# Altium PCB RiskChemi_Monitor_V1.03.PcbDoc
Units mil, origin at the board's own origin, x right, y up, seen from the top; angles counter-clockwise.
Board outline 4785.03 x 2920.97 mil, 2 copper layers (Top Layer, Bottom Layer); 53 components, 47 nets, 225 pads, 566 vias.
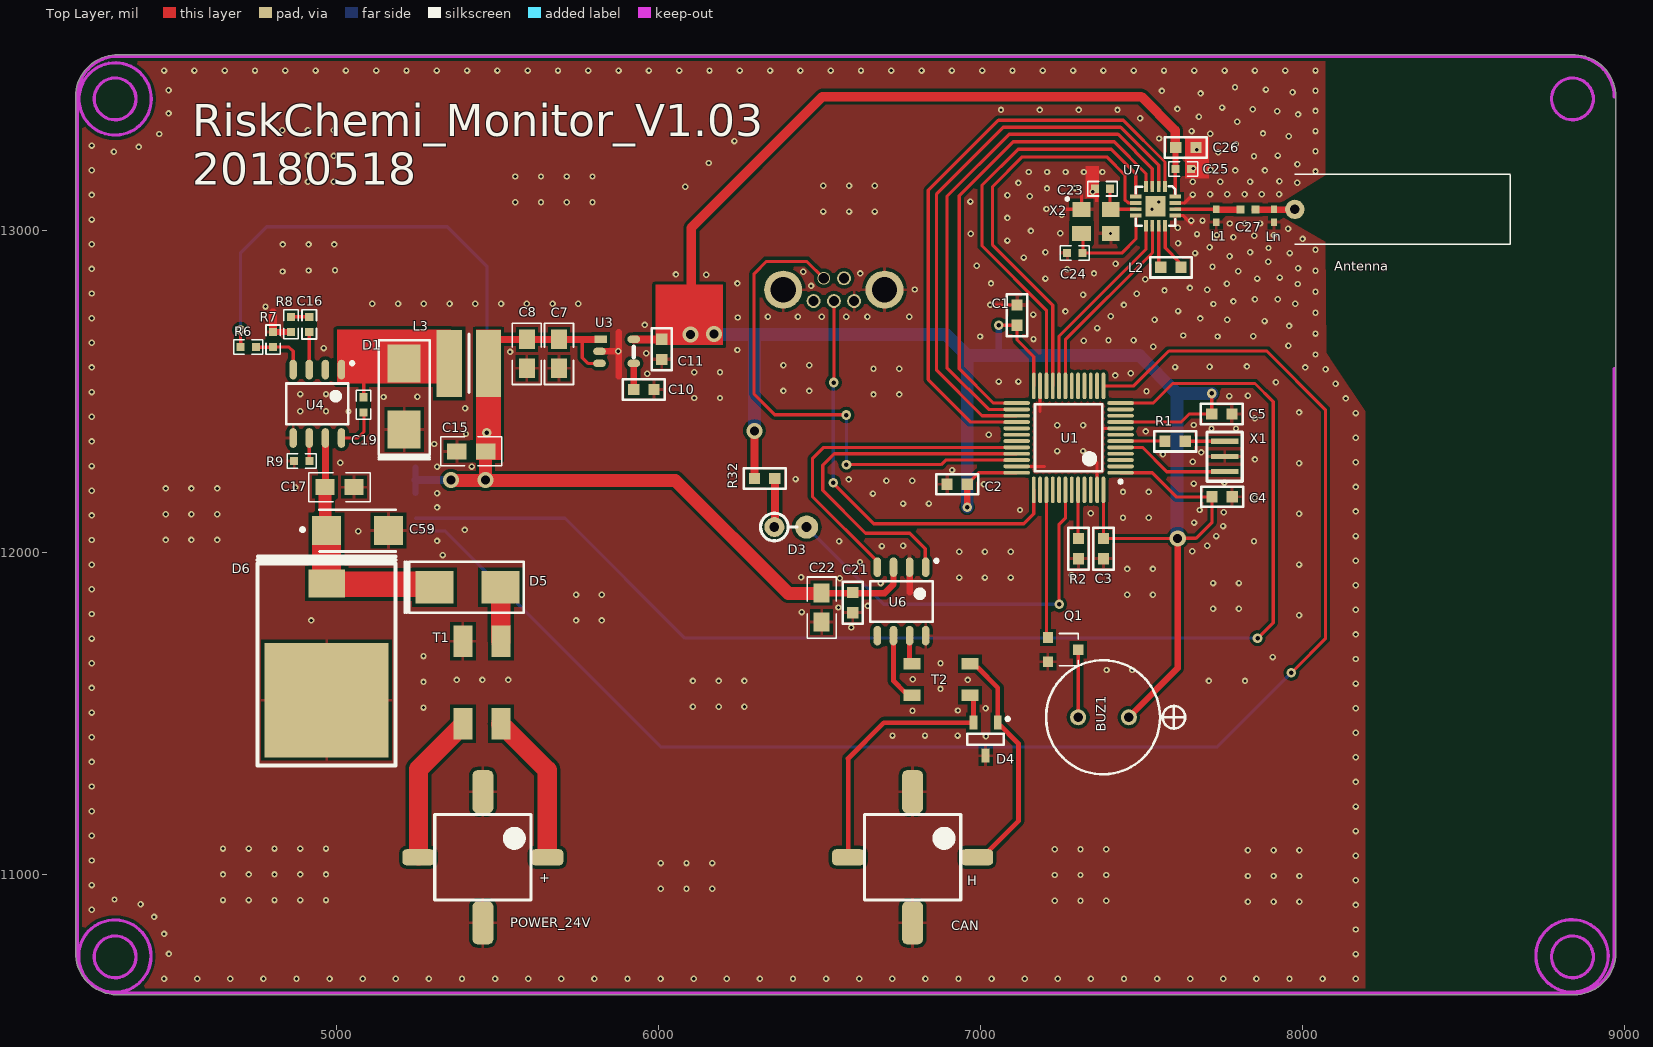
[diagram p0: Top Layer view]
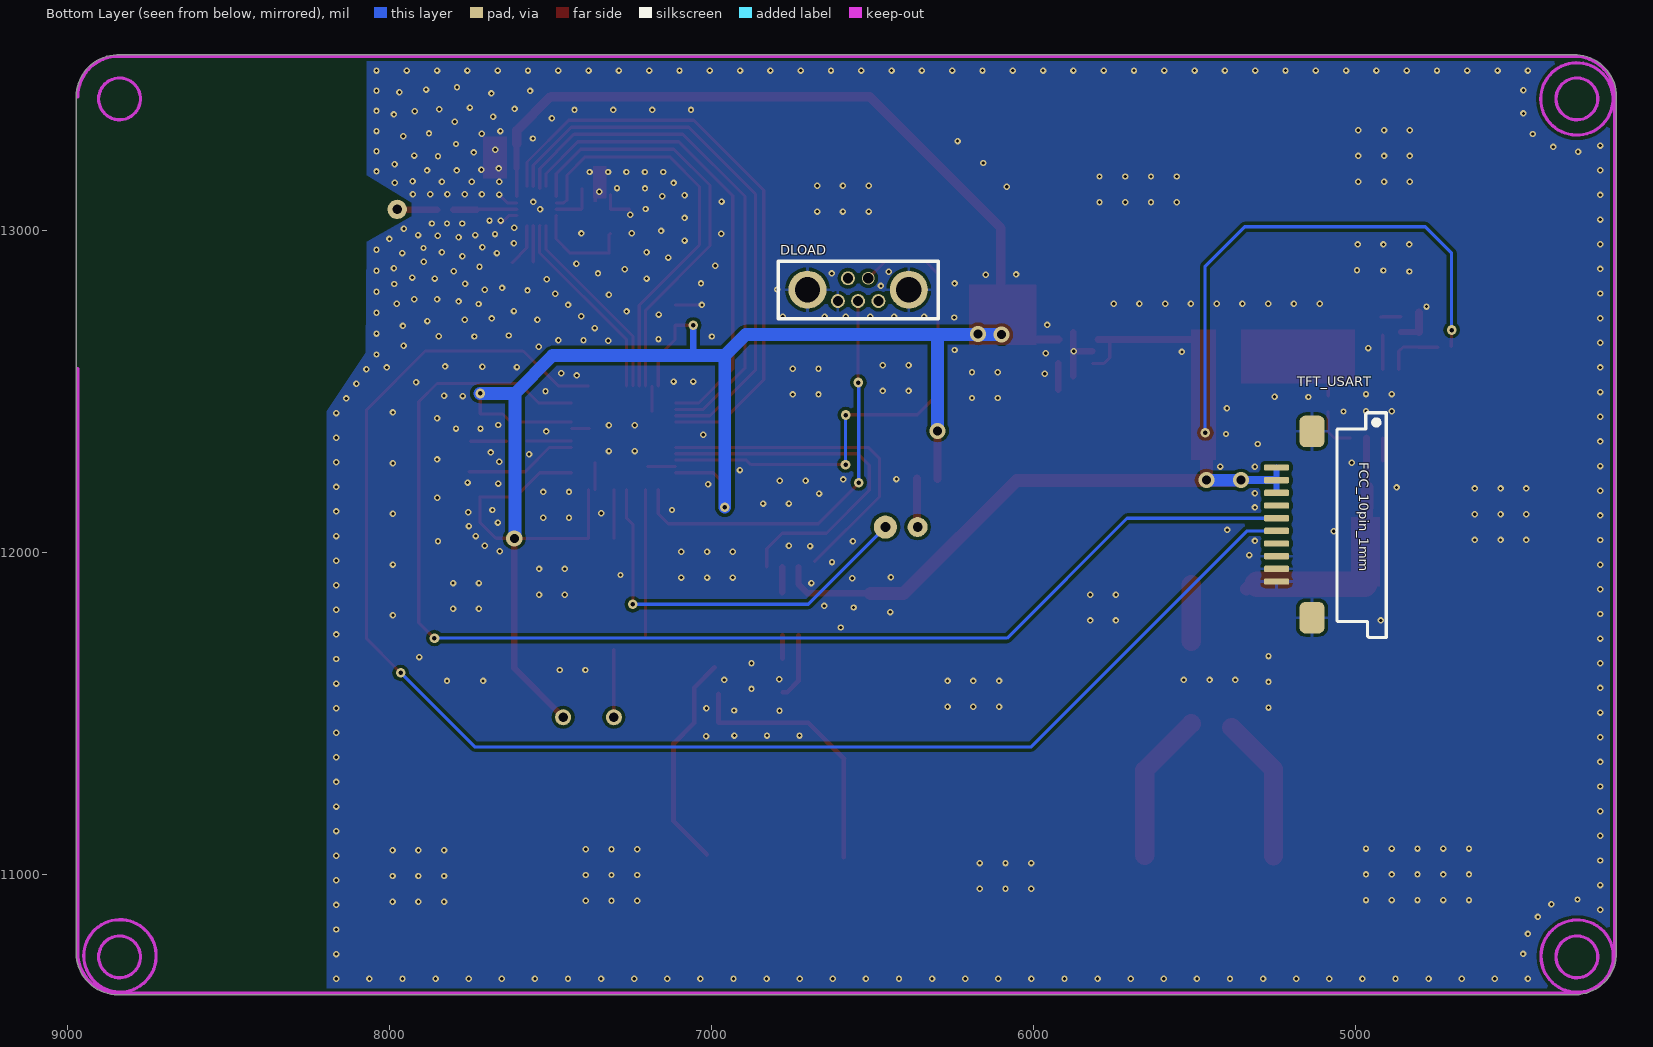
[diagram p1: Bottom Layer view, seen from below]

## Layer stack, top to bottom
Top Solder: solder mask 0.4, Solder Resist, Dk 3.5
Top Layer: signal copper 1.4
Dielectric 1: dielectric 12.6, FR-4, Dk 4.8
Bottom Layer: signal copper 1.4
Bottom Solder: solder mask 0.4, Solder Resist, Dk 3.5

## Board outline
4314.82,10626.02 ccw(c4315.45,10631) 4315.45,10625.99 8843,10625.99 ccw(c8843,10756) 8973.01,10755.2 ccw(c8843,10756) 8973.01,10756 8973.01,13416 ccw(c8843,13416) 8845.98,13545.98 ccw(c8843,13541.94) 8843,13546.96 4314.15,13546.96 ccw(c4314.15,13541.94) 4310.97,13545.82 ccw(c4318,13416) 4187.99,13416 4187.99,10748.45 ccw(c4193,10748.45) 4188.32,10746.64 ccw(c4318,10756)

## Design rules (kind name [scope] priority, off if disabled: settings)
Clearance Clearance_1 [InNamedPolygon('Top Layer-No Net1')] p1: gap=10
Clearance [All] p2: gap=3
ComponentClearance [All] p1: gap=0 collisioncheckmode=3 verticalgap=0 showdistances=FALSE
PolygonConnect PolygonConnect_Via [IsVia] p1: connectstyle=Direct reliefconductorwidth=10 reliefentries=4 polygonreliefangle="90 Angle" airgapwidth=10
PolygonConnect PolygonConnect_DGND [InNet('DGND')] p2: connectstyle=Relief reliefconductorwidth=10 reliefentries=4 polygonreliefangle="90 Angle" airgapwidth=10
RoutingVias [All] p1: holewidth=28 width=50 viastyle="Through Hole" minholewidth=28 minwidth=50 maxholewidth=28 maxwidth=50
SilkToSilkClearance [All] p1 off: silktosilkclearance=10
SilkToSolderMaskClearance [IsPad] p1 off: minsilkscreentomaskgap=10 clearancetoexposedcopper=TRUE
SolderMaskExpansion [All] p1: expansion=4
Width [All] p1: maxlimit=100 minlimit=10 preferedwidth=10
27 further rules are at their usual default settings.

## Components (designator, comment, footprint, x,y, rotation, side; value= is the part's Value field where it differs from the comment)
Antenna "AT" "433MHz Atenna" 7976,13066 r90 top (schematic designator Atenna)
BUZ1 "BUZZER" BUZ0905 7382,11488 r0 top
C1 "100nF" 0603 7117,12676 r180 top
C2 "100nF" 0603 6988,12216 r270 top
C3 "100nF" 0603 7377,12073 r0 top
C4 "100nF" 0603 7689,12169 r90 top
C5 "1uF" 0603 7688,12426 r90 top
C7 "100nF" 0805 5665,12575 r270 top
C8 "22uF" 0805 5565,12575 r270 top
C10 "22nF" 0603 5892,12502 r90 top
C11 "1uF" 0603 6005,12692 r0 top
C15 "22uF" 0805 5375,12339 r180 top
C16 "330pF" 0402#1 4910,12812.66 r0 top
C17 "1uF" 0805 5050,12178 r0 top
C19 "100nF" 0402#1 5079,12563 r0 top
C21 "100nF" 0603 6607,11783 r180 top
C22 "22uF" 0805 6481,11787 r270 top
C23 "18pF" 0402#1 7274,13126 r90 top
C24 "18pF" 0402#1 7188,12926 r90 top
C25 "470pF" 0402#1 7525,13187 r90 top
C26 "100nF" 0603 7576,13254 r90 top
C27 "2.7pF" nosilk_0402 7803,13062 r90 top
C59 "10uF" 6032_pol 5180,12023 r0 top
CAN "Header 4" C3000VS 6938,11186 r90 top
D1 "B290-13-F" B290 5209,12382 r90 top
D3 "LED0" LED 6359,12079 r270 top
D4 "PESD2CAN" SOT23 7013,11419 r270 top
D5 "VS-3EJH02HM3/6A" B290 5303,11892 r0 top
D6 "SM8S33" SM8S 4968,11541 r90 top
DLOAD "USB Connector" Mini_USB 6543.84,12781 r90 bottom
L1 "6.8nH" 0402#2 7732,13046 r90 top
L2 "3.9nH" 0603 7652,12890 r270 top
L3 "15uH" "4*4 Inductor" 5410,12595 r90 top
Ln "6.8nH" 0402#2 7911,13046 r90 top
POWER_24V "Header 4" C3000VS 5603,11186 r90 top
Q1 "2N7002" 2N7002 7255,11700 r270 top
R1 "100" 0603 7543,12341 r90 top
R2 "10K" 0603 7308,11951 r180 top
R6 "210K" 0402#1 4620,12634 r90 top
R7 "40.2K" 0402#1 4806,12557 r180 top
R8 "47.5K" 0402#1 4853,12813 r0 top
R9 "200K" 0402#1 4995,12288 r270 top
R32 "2.2K" 0603 6390,12234 r270 top
T1 "ACM7060-301-2PL-TL01" ACM7060-301-2P-TL01 5508,11466 r90 top
T2 "ACT45B-510-2P" ACT45B-510-2P 6787,11556 r0 top
TFT_USART "TFT" FCC_10pin_1mm 5244,12264 r0 bottom
U1 "STM32F103C8T6" STM-LQFP48_M 7273,12356 r180 top
U3 "RT9193" SOT-23-5 5863,12623 r270 top
U4 "MP2565" SO8 4940,12463 r270 top
U6 "TJA1050T" SO8 6755,11849 r270 top
U7 "CMT2219A" QFN16 7543.58,13076.16 r270 top
X1 "8M smd" 8Mhz_XTAL 7758,12251 r90 top
X2 "XTAL_TSX3225_26M" XTAL3225 7403.58,12991.16 r180 top

## Footprints (in the part's own frame and the unit in brackets; to place one, negate y for a bottom-side part, rotate by r counter-clockwise, add the part's x,y. Pads: shape width x height; smd on the part's side, far side on the other; paste and mask are expansions set on the pad)
2N7002 [mm]
  rect 0.85x0.8 smd: 1(0.047,1.221) 2(-0.903,-1.179) 3(0.997,-1.179)
  silkscreen extent -1.23,-0.28 1.32,1.22
"4*4 Inductor" [mm]
  rect 5.3x2 smd: 1(-0.203,-1.548) 2(-0.203,1.552)
  silkscreen extent -2.46,0 2.13,0
8Mhz_XTAL [mm]
  rect 0.4x2.2 smd: 1(0,0) 2(1.2,0) 3(2.4,0)
  silkscreen extent -0.75,-1.39 3.13,1.4
0402#1 [mil]
  rect 25x25 smd: 1(4.06,-127.99) 2(4.06,-80.75)
  silkscreen extent -19,-150 26,-59
0402#2 [mil] "Chip Capacitor, Body 1.0x0.5mm, IPC High Density"
  rect 23.62x19.68 smd: 1(-19.69,0) 2(19.69,0)
  body extent -22,-12 22,12, height 51
"433MHz Atenna" [mil]
  round 60 hole 30: 1(-0.04,0.19)
  silkscreen extent -108,-670 108,0
0603 [mil]
  rect 35x35 smd: 1(4.25,-92.76) 2(4.25,-29.76)
  silkscreen extent -27,-126 36,4
0805 [mil]
  rect 60x50 smd: 1(3,25) 2(-87,25)
  silkscreen extent -137,-20 53,70
6032_pol [mm]
  rect 2.3x2.3 smd: 1(-5.396,1.143) 2(-0.496,1.143)
  silkscreen extent -7.43,-0.51 0.05,2.79
ACM7060-301-2P-TL01 [mm]
  rect 2.5x1.5 smd: 1(0.051,-0.028) 2(6.551,-0.028) 3(0.051,2.972) 4(6.551,2.972)
ACT45B-510-2P [mm]
  rect 1.35x0.9 smd: 1(0,0) 2(4.55,0) 3(0,2.5) 4(4.55,2.5)
B290 [mm]
  rect 3x2.6 smd: 1(0,0) 2(5.2,0)
  silkscreen extent -2.34,-2 7.06,2
BUZ0905 [mm] "Buzzer"
  round 1.27 hole 0.75: 1(1.985,0.002) 2(-2.015,0.002)
  silkscreen extent -4.54,-4.5 6.43,4.5
C3000VS [mm]
  rrect50% 1.27x2.54 smd: 1(-3.375,-1.28) 2(-3.375,8.88)
  rrect50% 3.4x1.65 smd: 3(-8.55,3.8) 4(1.8,3.8)
  silkscreen extent -6.75,0 0,7.6
FCC_10pin_1mm [mm]
  rrect50% 2x0.5 smd: 1(0,0) 2(0,1) 3(0,2) 4(0,3) 5(0,4) 6(0,5) 7(0,6) 8(0,7) 9(0,8) 10(0,9)
  rrect50% 2x2.5 smd: 11(-2.8,-2.85) 12(-2.8,11.85)
  silkscreen extent -8.66,-4.32 -4.78,13.41
LED [mil]
  round 62 hole 30: 1(0,0)
  round 72 hole 30: 2(0,100)
  silkscreen extent -43,-43 43,70
Mini_USB [mm] "180 degree"
  round 1.1 hole 0.8: 1(0,-1.6) 3(0,0) 4(1.8,0.8) 5(0,1.6)
  round 1 hole 0.8: 2(1.8,-0.8)
  round 3 hole 2: 6(0.9,4) 7(0.9,-4)
  silkscreen extent -1.39,-6.32 3.15,6.3
nosilk_0402 [mil]
  rect 25x25 smd: 1(4.06,-50.99) 2(4.06,-3.75)
QFN16 [mm]
  rect 1x0.4 on Top Solder: 0(-1.546,0.735) 0(-1.546,-0.265) 0(-1.546,0.235) 0(-1.546,-0.765) 0(1.554,0.735) 0(1.554,-0.265) 0(1.554,0.235) 0(1.554,-0.765)
  rect 0.4x1 on Top Solder: 0(-0.746,1.535) 0(-0.746,-1.565) 0(-0.246,1.535) 0(-0.246,-1.565) 0(0.254,1.535) 0(0.254,-1.565) 0(0.754,1.535) 0(0.754,-1.565)
  rect 1.6x1.6 smd: 0(0.004,-0.015)
  rect 0.9x0.3 smd paste-0.175 mask-0.175: 1(-1.546,0.735) 2(-1.546,0.235) 3(-1.546,-0.265) 4(-1.546,-0.765) 9(1.554,-0.765) 10(1.554,-0.265)
  rect 0.3x0.9 smd paste-0.175 mask-0.175: 5(-0.746,-1.565) 6(-0.246,-1.565) 7(0.254,-1.565) 8(0.754,-1.565) 13(0.754,1.535) 14(0.254,1.535) 15(-0.246,1.535) 16(-0.746,1.535)
  rect 0.9x0.3 smd paste-0.225 mask-0.225: 11(1.554,0.235) 12(1.554,0.735)
  silkscreen extent -1.55,-1.58 1.56,1.56
SM8S [mm]
  rect 9x9.8 smd: 1(0,0)
  rect 2.2x2.9 smd: 2(9.2,0)
  silkscreen extent -5.14,-5.44 11.35,5.44
SO8 [mm] "39MM"
  oval 1.55x0.6 smd: 1(-2.675,1.88) 2(-2.675,0.61) 3(-2.675,-0.66) 4(-2.675,-1.93) 5(2.725,-1.93) 6(2.725,-0.66) 7(2.725,0.61) 8(2.725,1.88)
  silkscreen extent -3.3,-2.48 1.63,2.85
SOT23 [mm]
  rect 1.1x0.6 smd: 1(-1.325,1.001) 2(-1.325,-0.899) 3(1.275,0.051)
  silkscreen extent -1.75,-1.4 0.4,1.93
SOT-23-5 [mm]
  rect 0.6x1 smd: 1(-0.995,-1.101)
  oval 0.6x1 smd: 2(-0.045,-1.201) 3(0.905,-1.201) 4(0.905,1.499) 5(-0.995,1.499)
  silkscreen extent -0.4,1.5 0.4,1.5, body extent -1.5,-1.3 1.4,1.5, height 1.2
STM-LQFP48_M [mm] "QFP, 48-Leads, Body 7x7mm, Pitch 0.5mm, IPC Low Density"
  oval 2.1x0.3 smd: 1(-4.1,2.75) 2(-4.1,2.25) 3(-4.1,1.75) 4(-4.1,1.25) 5(-4.1,0.75) 6(-4.1,0.25) 7(-4.1,-0.25) 8(-4.1,-0.75) 9(-4.1,-1.25) 10(-4.1,-1.75) 11(-4.1,-2.25) 12(-4.1,-2.75) 25(4.1,-2.75) 26(4.1,-2.25) 27(4.1,-1.75) 28(4.1,-1.25) 29(4.1,-0.75) 30(4.1,-0.25) 31(4.1,0.25) 32(4.1,0.75) 33(4.1,1.25) 34(4.1,1.75) 35(4.1,2.25) 36(4.1,2.75)
  oval 0.3x2.1 smd: 13(-2.75,-4.1) 14(-2.25,-4.1) 15(-1.75,-4.1) 16(-1.25,-4.1) 17(-0.75,-4.1) 18(-0.25,-4.1) 19(0.25,-4.1) 20(0.75,-4.1) 21(1.25,-4.1) 22(1.75,-4.1) 23(2.25,-4.1) 24(2.75,-4.1) 37(2.75,4.1) 38(2.25,4.1) 39(1.75,4.1) 40(1.25,4.1) 41(0.75,4.1) 42(0.25,4.1) 43(-0.25,4.1) 44(-0.75,4.1) 45(-1.25,4.1) 46(-1.75,4.1) 47(-2.25,4.1) 48(-2.75,4.1)
  silkscreen extent -4.23,-2.65 2.65,3.57, body extent -3.5,-3.5 3.5,3.5, height 1.6
XTAL3225 [mm]
  rect 1.4x1.2 smd: 1(0,-1.9) 2(2.3,-1.9) 4(0,0)
  rect 1.5x1.2 smd: 3(2.3,0)
  silkscreen extent 3.32,-2.82 3.52,-2.62

## Part data
BUZ1: "Buzzer"
C1 C2 C3 C4 C5 C8 C10 C11 C16 C19 C21 C22 C23 C24 C25 C26 C27: library part Cap, "Capacitor"
C7 C17: library part Cap, "Capacitor,100V"
C15: library part Cap, "Capacitor,50V"
C59: library part "Cap Pol1", "Polarized Capacitor (Radial)"
CAN POWER_24V: "Header, 4-Pin"
D1: library part Diode, "Default Diode"
D3: "green LED"
D4: library part PESD1CAN
D5 D6: library part "Diode 1N4007", "1 Amp General Purpose Rectifier"
DLOAD: library part Component_1
L1 L2 Ln: library part Inductor, "Inductor"
L3: library part Inductor, "Inductor, 1A"
Q1: library part N-MOSFET
R1 R2 R6 R7 R8 R9 R32: library part Res1, "Resistor"
T1 T2: library part "Trans Eq", "Transformer (Equivalent Circuit Model)"
TFT_USART: library part "Header 12", "Header, 12-Pin"
U1: "ARM Cortex-M3 32-bit MCU, 64 KB Flash, 20 KB Internal RAM, 37 I/Os, 48-pin LQFP, -40 to 85 degC, Tray"
U4: library part MP1584, "DCDC 4.5V~28V input 1.8V ~5V output low power"
U6: "CAN Tranceiver"
X2: library part XTAL_Negative

## Via types
v1: diameter 20, hole 10, Top Layer to Bottom Layer, tented both sides, 542 vias
v2: diameter 30, hole 14, Top Layer to Bottom Layer, 7 vias
v3: diameter 20, hole 10, Top Layer to Bottom Layer, 6 vias
v4: diameter 50, hole 28, Top Layer to Bottom Layer, 6 vias
v5: diameter 30/30 (per signal layer), hole 14, Top Layer to Bottom Layer, 5 vias

## Nets (pads, with @x,y where several pads share a name; then routed paths per layer and width w, separated by ;. In a path a pad name is that pad's centre, name@x,y a point inside that pad or via, vN(x,y) a via of type N, cw(c..) or ccw(c..) an arc to the next point about the centre after c; other vN are vias at no path point)
5V: C7.2 C8.2 C15.2 C21.1 C22.2 L3.1 R6.2 TFT_USART.1 TFT_USART.2 TFT_USART.3 U3.1 U3.3 U6.3 | length 4157
  Top Layer w10: v5@4700.75,12684.25 R6.2@4701,12640 ; C15.2@5465,12310 v5(5465,12372) ; 5762,12659 5762,12605 5779.63,12587.37 U3.3
  Top Layer w20: C22.2 6702,11874 6729,11901 ; 6729,11903 U6.3
  Top Layer w22: L3.1@5495.17,12662.17 5798.65,12662.17
  Top Layer w30: C22.2@6506,11873 C22.2
  Top Layer w40: v4@5354,12224 v4@5463,12224 ; C15.2 v4(5462,12225) v4@5463,12224 ; C22.2@6506,11873 6402,11873 6051,12224 v4@5463,12224
  Bottom Layer w10: v5(4700,12691) 4700,12930 4782,13012 5343,13012 5466,12889 v5@5466,12371
  Bottom Layer w20: TFT_USART.3@5244,12186 TFT_USART.2 TFT_USART.1@5244,12263
  Bottom Layer w25: TFT_USART.2 5415,12224.63
  Bottom Layer w40: v4@5360,12224 v4(5462,12225)
  other v4: 5354,12225
24V: C17.2 C59.1 D5.1 D6.2 U4.7 | length 663.8
  Top Layer w22: C17.2@4964,12204 U4.7
  Top Layer w40: C17.2@4963,12202 C59.1@4963.6,12067.98 ; D5.1@5306,11918 D5.1@5338,11886
  Top Layer w80: D6.2@4970.2,11901 D5.1@5303,11901
BUZZER: Q1.2 U1.39 | length 453.6
  Top Layer w10: Q1.2@7204.1,11741 U1.39
CAN_RX: U1.32 U6.4 | length 1051.2
  Top Layer w10: U6.4@6678.5,11972.5 6477,12174 6477,12291 6512.47,12326.47 U1.32
CAN_TX: U1.33 U6.1 | length 1145.4
  Top Layer w10: U6.1@6828,11956 6828,12012 6780,12060 6642,12060 6509,12193 6509,12271 6544.79,12306.79 U1.33
CLKO: U1.21 U7.6 | length 1284.2
  Top Layer w10: U1.21 7223.79,12768.21 7037,12955 7037,13137 7129,13229 7391.64,13229 7448,13172.64 7448,13096 7458.16,13085.84 U7.6
CSB: U1.28 U7.1 | length 1872.9
  Top Layer w10: U1.28 6968.79,12405.21 6837,12537 6837,13125 7055,13343 7442.64,13343 7572.53,13213.11 U7.1
D3V3: BUZ1.1 C1.2 C2.2 C3.2 C4.2 C5.2 C11.2 C25.2 C26.2 R32.1 U1.1 U1.9 U1.24 U1.36 U1.48 U3.5 U7.16 | length 7978.1
  Top Layer w10: C2.2 6994.22,12247.73 U1.36 ; v5@7052.24,12705.76 C1.2 ; C1.2@7113,12707 7113,12660 7164.73,12608.27 U1.24 ; U1.48 C3.2 v4@7604.24,12043.24 ; U1.1 7533.27,12247.73 7609,12172 C4.2@7718.76,12172 ; U1.9 7622.21,12405.21 7647.25,12430.25 C5.2 v5@7717.76,12495 ; U7.16 7604.02,13194.19 C25.2@7605.14,13195.3 ; C26.2@7604.16,13270.5 C26.2@7605.14,13269.52 ; v4(7612,12044) 7669,12044 7718.76,12093.76 C4.2@7718.76,12172 ; C4.2 C4.2@7718.76,12172
  Top Layer w20: v2(6958,12141) 6958,12211.51 C2.2 ; BUZ1.1@7461,11490 7612,11641 v4(7612,12044) ; C25.2@7605.14,13195.3 C26.2@7605.14,13269.52
  Top Layer w25: U3.5 v4@6096.83,12662.17 ; R32.1@6297,12228 v4(6297,12378)
  Top Layer w30: v4@6101,12661 6101,13009 6508,13416 7499,13416 7604.16,13310.85 C26.2@7604.16,13270.5
  Bottom Layer w20: 7056,12613 v5(7056,12706)
  Bottom Layer w40: v4(6098,12677) 6893,12677 6958,12612 ; v4(6297,12378) 6297,12665 6304,12672 6301,12675 ; v2(6958,12141) 6958,12612 ; v4@7610,12055 7610,12494 ; v5@7719,12494 7610,12494 ; 6958,12612 7493,12612 7610,12494
  other v4: 6171,12679
  other v5: 7718,12494
DGND: C1.1 C2.1 C3.1 C4.1 C5.1 C7.1 C8.1 C10.1 C11.1 C15.1 C17.1 C21.2 C22.1 C23.2 C24.2 C25.1 C26.1 C59.2 CAN.3 CAN.4 D1.1 D4.3 D6.1 DLOAD.5 DLOAD.6 DLOAD.7 L1.1 Ln.1 POWER_24V.3 POWER_24V.4 Q1.3 R2.2 R7.1 R8.1 R9.1 T1.4 TFT_USART.8 TFT_USART.9 TFT_USART.10 TFT_USART.11 TFT_USART.12 U1.8 U1.23 U1.35 U1.47 U3.2 U4.5 U6.2 U6.8 U7.0@7543,13076 U7.13 U7.15 X1.2 X2.2 X2.4 | length 1006.5
  Top Layer w10: v1@7027.24,12768.76 C1.1 ; U1.35 7198.42,12267.42 ; 7184.42,12438.58 U1.23 ; 7254.04,13065.96 X2.2 7313.03,13112.03 ; U1.47 7361.58,12278.58 ; 7378.53,12385.53 U1.8 ; U7.13 7629.17,13046.47 v1@7654.39,13021.25 ; U7.15 7633.99,13085.84 v1@7654.39,13106.25
  Top Layer w20: R7.1 R8.1@4856.99,12684.99 ; U3.2 v1@5876,12624.77 ; 5876,12547 v1@5876,12624.77 ; 5876,12684 v1@5876,12624.77 ; 6779,11876 U6.2
  Top Layer w25: R7.1 4801.94,12745.06
  other v1: 4463,10676 4565.83,10676 4668.67,10676 4771.5,10676 4874.33,10676 4977.17,10676 5080,10676 5182.83,10676 5285.67,10676 5388.5,10676 5491.33,10676 5594.17,10676 5697,10676 5799.83,10676 5902.66,10676 6005.5,10676 6108.33,10676 6211.16,10676 6314,10676 6416.83,10676 6519.66,10676 6622.5,10676 6725.33,10676 6828.16,10676 6931,10676 7033.83,10676 7136.66,10676 7239.5,10676 7342.33,10676 7445.16,10676 7548,10676 7650.83,10676 7753.66,10676 7856.5,10676 7959.33,10676 8062.16,10676 8165,10676 8165,10752.39 4478,10753 4463,10815 8165,10828.78 4432,10868 4238,10890 8165,10905.17 4390,10907 7830,10915 7910,10915 7990,10915 7230,10918 7310,10918 7390,10918 4646,10920 4726,10920 4806,10920 4886,10920 4966,10920 4309,10922 6006,10955 6086,10955 6166,10955 4238,10966.58 8165,10981.56 7830,10995 7910,10995 7990,10995 7230,10998 7310,10998 7390,10998 4646,11000 4726,11000 4806,11000 4886,11000 4966,11000 6006,11035 6086,11035 6166,11035 4238,11043.16 8165,11057.96 7830,11075 7910,11075 7990,11075 7230,11078 7310,11078 7390,11078 4646,11080 4726,11080 4806,11080 4886,11080 4966,11080 4238,11119.74 8165,11134.35 4238,11196.32 8165,11210.74 4238,11272.9 8165,11287.13 4238,11349.48 8165,11363.52 4238,11426.06 7016,11429 6726,11431 6827,11431 6928,11431 8165,11439.91 4238,11502.64 6788,11508 6929,11509 7015,11516 8165,11516.3 5269,11518 6106,11521 6186,11521 6266,11521 6875,11576 4238,11579.23 8165,11592.69 5269,11598 6106,11601 6186,11601 6266,11601 7709,11601 7821,11601 5372,11604 5452,11604 5532,11604 6960,11604 6789,11606 7391,11635 7471,11635 4238,11655.81 6875,11656 8165,11669.09 7907.5,11675 5269,11678 4238,11732.39 8165,11745.48 6598,11767 4920,11789 5743,11789 5823,11789 7989,11805 4238,11808.97 6444,11815 8165,11821.87 7722,11825 7802,11825 6558,11829 6649,11834 5743,11869 5823,11869 7455,11869 7535,11869 4238,11885.55 8165,11898.26 6689,11905 7722,11905 7802,11905 6562,11920 6933,11922 7013,11922 7093,11922 6442,11923 7282,11930 7455,11949 7535,11949 4238,11962.13 7989,11962.5 6625,11970 8165,11974.65 5329,11992 6933,12002 7013,12002 7093,12002 7657,12004 6693,12020 6759,12021 7704,12021 6560,12035 7849,12035 5311,12036 4238,12038.71 4468,12039 4548,12039 4628,12039 7732,12051 8165,12051.04 5066,12066 5397,12070 7753,12082 7663,12093 7442,12108 7522,12108 4238,12115.29 4468,12119 4548,12119 4628,12119 7989,12120 7342,12122 7755,12125 8165,12127.43 7122,12132 7680,12132 5311,12140 6759,12152 6839,12152 7851,12170 6665,12183 5311,12184 7442,12188 7522,12188 4238,12191.87 4468,12199 4548,12199 4628,12199 4871,12202 8165,12203.82 7010,12212 7662,12214 7757,12217 6707,12223 6787,12223 6590,12227 6425,12228 6911,12256 5311,12266 5419,12267 4238,12268.45 7989,12277.5 5010,12279 8165,12280.22 7659,12282 7852,12289 7566,12305 7685,12311 7238,12315 7318,12315 5302,12337 4238,12345.03 8165,12356.61 7025,12366 5401,12368 7513,12376 7717,12385 7793,12385 7238,12395 7318,12395 7662,12396 7852,12417 4238,12421.61 8165,12433 7989,12435 5036,12438 4886,12439 4966,12439 5398,12448 8133.75,12478.5 6110,12480 6190,12480 5145,12483 5250,12484 7772,12486 7830,12487 6667,12491 6747,12491 4886,12492 4966,12492 4238,12498.19 7515,12501 6387,12502 6467,12502 8102.5,12524 7917,12529 7056,12531 7117,12531 7418,12550 5964,12555 7466,12557 6110,12560 6190,12560 8071.24,12569.5 6667,12571 6747,12571 4238,12574.77 8008,12575 7604,12576 7711,12577 7827,12578 6387,12582 6467,12582 8039.99,12615 5961,12619 5538,12623 5874,12625 6244,12629 4959,12635 7536,12639 7956,12642 4238,12651.35 7320,12658 7397,12659 7475,12659 7164,12663 6998,12671 7736,12671 7847,12672 7629,12674 8039.99,12680.05 7362,12697 7958,12704 5956,12707 7882,12719 7540,12723 7766,12723 7682,12727 4238,12727.93 6245,12730 6339,12732 6432,12732 6506,12732 6582,12732 6648,12732 6778,12732 7404,12734 7163,12739 8039.99,12745.09 7263,12749 7613,12750 4778,12764 7029,12769 7445,12769 7723,12772 5110,12773 5190,12773 5270,12773 5350,12773 5430,12773 5510,12773 5590,12773 5670,12773 5750,12773 7977,12773 7785,12780 7852,12787 7923,12787 7318,12801 7485,12804 4238,12804.51 8039.99,12810.14 7571,12814 7704,12816 6795,12817 7650,12822 6473,12828 7985,12834 7765,12835 6244,12836 7032,12836 7511,12849 7201,12851 7859,12851 7929,12854 6147,12863 6053,12864 6626,12867 7352,12867 6449,12872 4831,12873 7800,12874 8039.99,12875.18 4912,12876 4994,12877 7269,12880 4238,12881.1 7986,12883 7720,12888 6988,12891 7419,12897 7893,12903 7134,12916 7773,12920 7666,12930 7960,12930 7201,12933 7837,12933 8039.99,12940.23 7894,12946 7711,12948 4832,12957 4912,12957 4992,12957 4238,12957.68 7613,12961 7083,12969 8000,12974 7785,12979 7850,12984 7733,12986 7911,12986 7672,12989 6969,12990 7247,12992 7156,12999 7955,13006 7612,13009 7774,13022 7821,13022 7868,13022 7654,13031 7689,13031 4238,13034.26 7083,13039.5 7252,13049 6511,13059 6591,13059 6671,13059 7204,13067 5554,13088 5634,13088 5714,13088 5794,13088 6968,13090 7152,13107 7083,13110 4238,13110.84 7659,13112 7712.6,13113 7766.2,13113 7819.8,13113 7873.4,13113 7927,13113 7206,13131 7293,13132 6082,13136 6511,13139 6591,13139 6671,13139 7117,13148 7983.5,13148.5 4830,13152 4910,13152 4990,13152 7659,13152 7744,13152 7837,13152 7928,13153 5554,13168 5634,13168 5714,13168 5794,13168 7149,13182 7206.25,13182 7263.5,13182 7320.75,13182 7378,13182 8040,13184 4238,13187.42 7791,13187 7883,13187 7714,13189 7984,13206 6155,13210 7849,13231 4830,13232 4910,13232 4990,13232 7923,13233 7738,13243 4307,13245 8039.99,13246.6 4384,13260 4238,13264 7793,13269 6235,13278 7554,13286 7957,13293 4448,13300 7713,13301 7877,13302 7655,13309 8039.99,13309.2 4830,13312 4910,13312 4990,13312 7797,13338 7495,13349 7678,13354 7986,13361 4477,13364 7921,13371 8039.99,13371.8 7063,13375 7183.67,13375 7304.33,13375 7425,13375 7845,13377 7611,13378 7750,13382 7683,13426 7969,13430 7563,13434 8039.99,13434.4 4477,13436 7886,13438 7790,13445 4463,13497 4557.13,13497 4651.26,13497 4745.39,13497 4839.53,13497 4933.66,13497 5027.79,13497 5121.92,13497 5216.05,13497 5310.18,13497 5404.31,13497 5498.45,13497 5592.58,13497 5686.71,13497 5780.84,13497 5874.97,13497 5969.1,13497 6063.23,13497 6157.37,13497 6251.5,13497 6345.63,13497 6439.76,13497 6533.89,13497 6628.02,13497 6722.15,13497 6816.28,13497 6910.42,13497 7004.55,13497 7098.68,13497 7192.81,13497 7286.94,13497 7381.07,13497 7475.2,13497 7569.34,13497 7663.47,13497 7757.6,13497 7851.73,13497 7945.86,13497 8039.99,13497
  other v3: 7403.58,12991.16 7532,13066 7553,13089 7348,13121 7660,13193 7671,13251
DOUT: U1.22 U7.5 | length 1333.8
  Top Layer w10: U1.22 7204.1,12752.9 7004,12953 7004,13141 7116,13253 7406,13253 7481.98,13177.02 U7.5
FCSB: U1.25 U7.4 | length 1490.9
  Top Layer w10: U1.25 7039.73,12464.27 6933,12571 6933,13108 7101,13276 7414.64,13276 7513.47,13177.17 U7.4
INT1: U1.20 U7.9 | length 609.7
  Top Layer w10: U1.20 7243.47,12672.47 7513.9,12942.9 7513.9,13014.55 U7.9
LED0: D3.2 U1.42 | length 1241.3
  Top Layer w10: v5@7243,11846 7243,12086 7263.16,12106.16 U1.42
  Bottom Layer w10: D3.2 6699,11839 v5(7244,11839)
NetAtenna_1: Antenna.1 C27.1 Ln.2 | length 126
  Top Layer w20: C27.1@7851,13065.3 Antenna.1@7977,13065.3
NetBUZ1_2: BUZ1.2 Q1.1 | length 211.1
  Top Layer w10: BUZ1.2@7303.07,11487.07 Q1.1
NetC10_2: C10.2 U3.4 | length 82.4
  Top Layer w20: C10.2@5922.02,12504.98 U3.4
NetC16_1: C16.1 U4.3 | length 107.3
  Top Layer w10: U4.3 C16.1@4914,12675.61
NetC16_2: C16.2 R8.2 | length 65.7
  Top Layer w10: R8.2 C16.2@4916.75,12732.25 ; C16.2 C16.2@4920.09,12731.91
NetC19_1: C19.1 U4.8 | length 141
  Top Layer w10: U4.8 5064.7,12355.7 5084,12375 C19.1@5084,12438
NetC19_2: C19.2 D1.2 L3.2 U4.1 | length 140.6
  Top Layer w10: U4.1@5013,12568 5064,12568 5083.06,12548.94 C19.2@5083.06,12486.25
NetC23_1: C23.1 U7.7 X2.1 | length 141.2
  Top Layer w10: X2.1@7401.58,13068.17 C23.1@7401.58,13131 ; X2.1@7403.58,13066.16 U7.7
NetC24_1: C24.1 U7.8 X2.3 | length 313.5
  Top Layer w10: X2.3 X2.3@7313.46,12990.73 ; C24.1@7317.38,12929 X2.3@7317.38,12986.81 ; C24.1@7318,12930 7438.14,12930 7482.4,12974.26 7482.4,13046.05 U7.8
NetC27_2: C27.2 L1.2 U7.14 | length 189
  Top Layer w10: U7.14 7719.39,13066.16
  Top Layer w20: L1.2@7728.34,13065.3 C27.2@7802,13065
NetCAN_1: CAN.1 D4.1 T2.4 | length 677
  Top Layer w10: D4.1 D4.1@7053,11470.58
  Top Layer w15: T2.4@6990.07,11642.93 7053,11580 7053,11470.58 7117,11406.58 7117,11165 CAN.1@7014,11062
NetCAN_2: CAN.2 D4.2 T2.2 | length 833.3
  Top Layer w15: 6588,11360 6699.18,11471.18 D4.2 T2.2@6977.6,11561 ; CAN.2 6588.39,11361
NetD3_1: D3.1 R32.2 | length 152.3
  Top Layer w20: D3.1@6359,12078 D3.1@6360.24,12079.24
  Top Layer w25: D3.1@6360.24,12079.24 R32.2
NetD5_1: D5.2 T1.2 | length 175.7
  Top Layer w60: T1.2 D5.2@5509.11,11899.61
NetL2_1: L2.1 U7.11 | length 113
  Top Layer w10: L2.1@7552.84,12902 U7.11
NetL2_2: L2.2 U7.12 | length 133.3
  Top Layer w10: U7.12 7572.95,13014.55 7572.95,12946.05 L2.2@7618.32,12900.68
NetPOWER_24V_1: POWER_24V.1 T1.1 | length 468.8
  Top Layer w60: T1.1 5653.39,11323.72 POWER_24V.1@5653.39,11059
NetPOWER_24V_2: POWER_24V.2 T1.3 | length 451.7
  Top Layer w60: POWER_24V.2@5253.39,11058 5253.39,11326.39 T1.3@5383,11456
NetR1_1: R1.1 X1.3 | length 112
  Top Layer w10: R1.1@7635.99,12345.49 X1.3@7748,12345.49
NetR1_2: R1.2 U1.6 | length 138.6
  Top Layer w10: U1.6 R1.2@7573,12346.16
NetR2_1: R2.1 U1.44 | length 150.8
  Top Layer w10: R2.1@7302.53,12043.76 U1.44
NetR6_1: R6.1 R7.2 U4.4 | length 183.8
  Top Layer w10: R6.1@4743.25,12637.75 R7.2 ; R7.2@4801,12638 4851,12638 4864,12625 U4.4
NetR9_2: R9.2 U4.6 | length 71.5
  Top Layer w10: R9.2@4914,12284.2 U4.6
NetT2_1: T2.1 U6.6 | length 204.2
  Top Layer w15: U6.6 6729,11601 6764,11566 T2.1@6778,11566
NetT2_3: T2.3 U6.7 | length 71.7
  Top Layer w15: T2.3@6779,11670 U6.7
NetU1_5: U1.5 X1.1 | length 349.8
  Top Layer w10: U1.5 7502.53,12326.47 7578,12251 X1.1@7753,12251
NRSTO: U1.19 U7.10 | length 609.7
  Top Layer w10: U1.19 7263.16,12661.16 7533.58,12931.58 7533.58,13014.55 U7.10
RS485_RE2: U1.11
SCL: U1.26 U7.3 | length 1625.8
  Top Layer w10: U1.26 7024.42,12444.58 6895,12574 6895,13106 7088,13299 7426.64,13299 7533,13192.64 U7.3@7533,13131
SDA: U1.27 U7.2 | length 1745.3
  Top Layer w10: U1.27 7004.1,12424.9 6863,12566 6863,13114 7070,13321 7434.64,13321 7552.84,13202.8 U7.2
SWCLK: DLOAD.3 U1.37 | length 1332.2
  Top Layer w10: v2(6542,12217) 6542,12215 6668,12089 7134,12089 7164.73,12119.73 U1.37 ; v2@6543.84,12527 DLOAD.3
  Bottom Layer w10: v2(6542,12217) 6542,12525 6545,12528 v2@6544,12529
  other v2: 6543,12528
SWDIO: DLOAD.2 U1.34 | length 1635.6
  Top Layer w10: DLOAD.2 6460.21,12904 6334,12904 6296,12866 6296,12492 6360,12428 v2@6587,12428 ; v2@6582,12273 v2(6583,12273) 6877,12273 6891.1,12287.1 U1.34
  Bottom Layer w10: v2(6583,12273) v2@6583,12428
  other v2: 6582,12427
USART2_RX: TFT_USART.6 U1.13 | length 4753.4
  Top Layer w10: U1.13 7476,12517.42 7584.58,12626 7889,12626 8071,12444 8071,11732 v2@7975.5,11636.5
  Bottom Layer w10: TFT_USART.6 5334.85,12067.15 6006,11396 7735,11396 v2(7965,11626) v2@7967,11626
USART2_TX: TFT_USART.5 U1.12 | length 4048.5
  Top Layer w10: U1.12 7535.27,12464.27 7596,12525 7852,12525 7909,12468 7909,11782 7861,11734 v2(7860,11734)
  Bottom Layer w10: TFT_USART.5 5708.48,12106.52 6081,11734 v2(7860,11734)
pads on no net: DLOAD.1 DLOAD.4 TFT_USART.4 TFT_USART.7 U1.2 U1.3 U1.4 U1.7 U1.10 U1.14 U1.15 U1.16 U1.17 U1.18 U1.29 U1.30 U1.31 U1.38 U1.40 U1.41 U1.43 U1.45 U1.46 U4.2 U6.5 U7.0@7481.98,13046.47 U7.0@7481.98,13066.16 U7.0@7481.98,13085.84 U7.0@7481.98,13105.53 U7.0@7513.47,13014.98 U7.0@7513.47,13137.02 U7.0@7533.16,13014.98 U7.0@7533.16,13137.02 U7.0@7552.84,13014.98 U7.0@7552.84,13137.02 U7.0@7572.53,13014.98 U7.0@7572.53,13137.02 U7.0@7604.02,13046.47 U7.0@7604.02,13066.16 U7.0@7604.02,13085.84 U7.0@7604.02,13105.53

## Polygon pours and split planes (outlines as drawn)
DGND on Top Layer "Top Layer-No Net" (solid, remove dead copper, pour order 22): 4314.82,10626.02 ccw(c4315.45,10631) 4315.45,10625.99 8843,10625.99 ccw(c8843,10756) 8973.01,10755.2 ccw(c8842.99,10756.01) 8973.01,10756 8973.01,13416 ccw(c8843,13416) 8845.98,13545.98 ccw(c8843,13541.94) 8843,13546.96 4314.15,13546.96 ccw(c4314.15,13541.94) 4310.97,13545.82 ccw(c4318,13416) 4187.99,13416 4187.99,10748.45 ccw(c4193,10748.45) 4188.32,10746.64 ccw(c4318,10756)
DGND on Bottom Layer "Top Layer-No Net1" (solid, remove dead copper, pour order 23): 4314.82,10626.02 ccw(c4315.45,10631) 4315.45,10625.99 8843,10625.99 ccw(c8843,10756) 8973.01,10755.2 ccw(c8842.99,10756.01) 8973.01,10756 8973.01,13416 ccw(c8843,13416) 8845.98,13545.98 ccw(c8843,13541.94) 8843,13546.96 4314.15,13546.96 ccw(c4314.15,13541.94) 4310.97,13545.82 ccw(c4318,13416) 4187.99,13416 4187.99,10748.45 ccw(c4193,10748.45) 4188.32,10746.64 ccw(c4318,10756)

## Keep-outs
Keep-Out Layer:
  circle w10: c4311,13409 r112.36
  circle w10: c8837,10747 r112.36
  circle w10: c4310,10746 r112.36
  circle w10: c4310.8,10743.8 r64.96
  circle w10: c4310.8,13409.15 r64.96
  circle w10: c8838.35,10743.8 r64.96
  circle w10: c8838.35,13409.15 r64.96
  lines w10: 4193,10748.45 4193,13416 cw(c4318,13416) 4318,13541 ; 4193,10756 ccw(c4318,10756) 4318,10631 ; 4314.15,13541.94 8843,13541.94 ; 4315.45,10631 8843,10631 ccw(c8843,10756) 8968,10756 ; 8843,13541 cw(c8843,13416) 8968,13416 ; 8968,10755.35 8968,12572

## Other copper
Top Layer:
  rectangle net DGND: 7355,13089 7366,13115
  rectangle net DGND: 7326,13100 7367,13200
  rectangle net DGND: 7634,13162 7709,13293
  rectangle net D3V3: 5989,12644 6200,12832
  rectangle net 5V: 5432,12288 5510,12692
  rectangle net NetC19_2: 5000,12525 5355,12692
  rectangle net 24V: 4923,11895 5012,12110
  pour cut-out: 7931,13086 8070,13172 8071,12965 7931,13045
  pour cut-out: 8070,13550 8975,13550 8975,10625 8195,10625 8195,12439 8100,12580 8073.03,12620.02 8070,13090 8070,13317 8070,13433
Bottom Layer:
  pour cut-out: 7931,13086 8070,13172 8071,12965 7931,13045
  pour cut-out: 8070,13550 8975,13550 8975,10625 8195,10625 8195,12439 8073,12620 8070,13080

## Silkscreen, mask and mechanical layers (free items; w line width, h text height)
Top Overlay:
  text "RiskChemi_Monitor_V1.03 / 20180518" at 4550,13143 h100
  text "+" at 5628,10976 h30
  text "H" at 6958,10966 h30
Mechanical 1:
  lines w10: 8968,12569 8968,13416

## Dimensions
9117,10636 to 9126,13541 on Top Overlay
4205,10507 to 8965,10505 on Top Overlay

## Text inside footprints (layer, text, board x,y; h text height)
TFT_USART: Bottom Overlay "FCC_10pin_1mm" at 4986.37,12281 h30 r90
U4: Mechanical 15 "1" at 4932.53,12444.29 h30
U6: Mechanical 15 "1" at 6747.53,11830.29 h30